# EAGLE board Sparkfun_LilyPad-Switched-Battery-Panel_v13b (EAGLE 9.6.2)
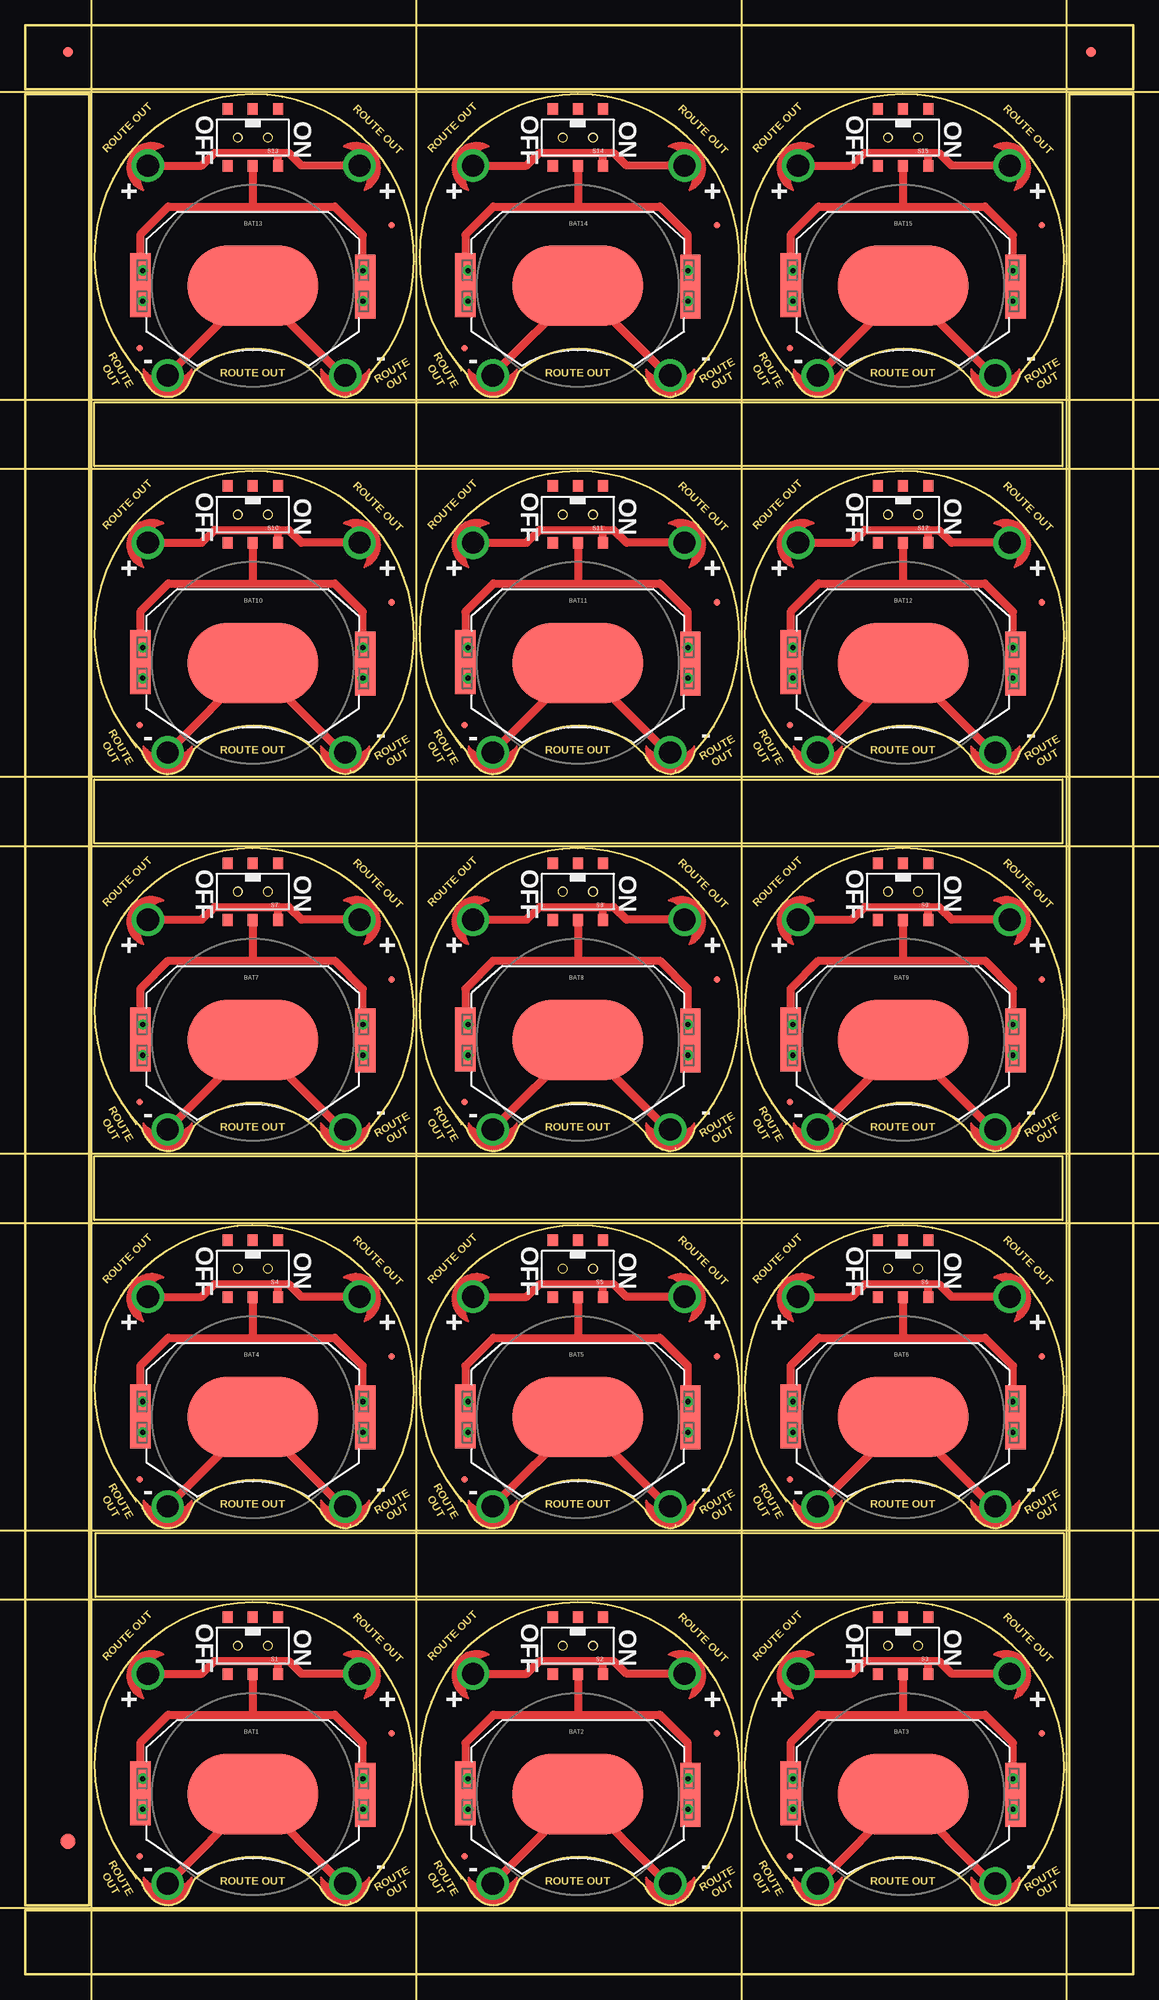
[diagram p0: board, top side]
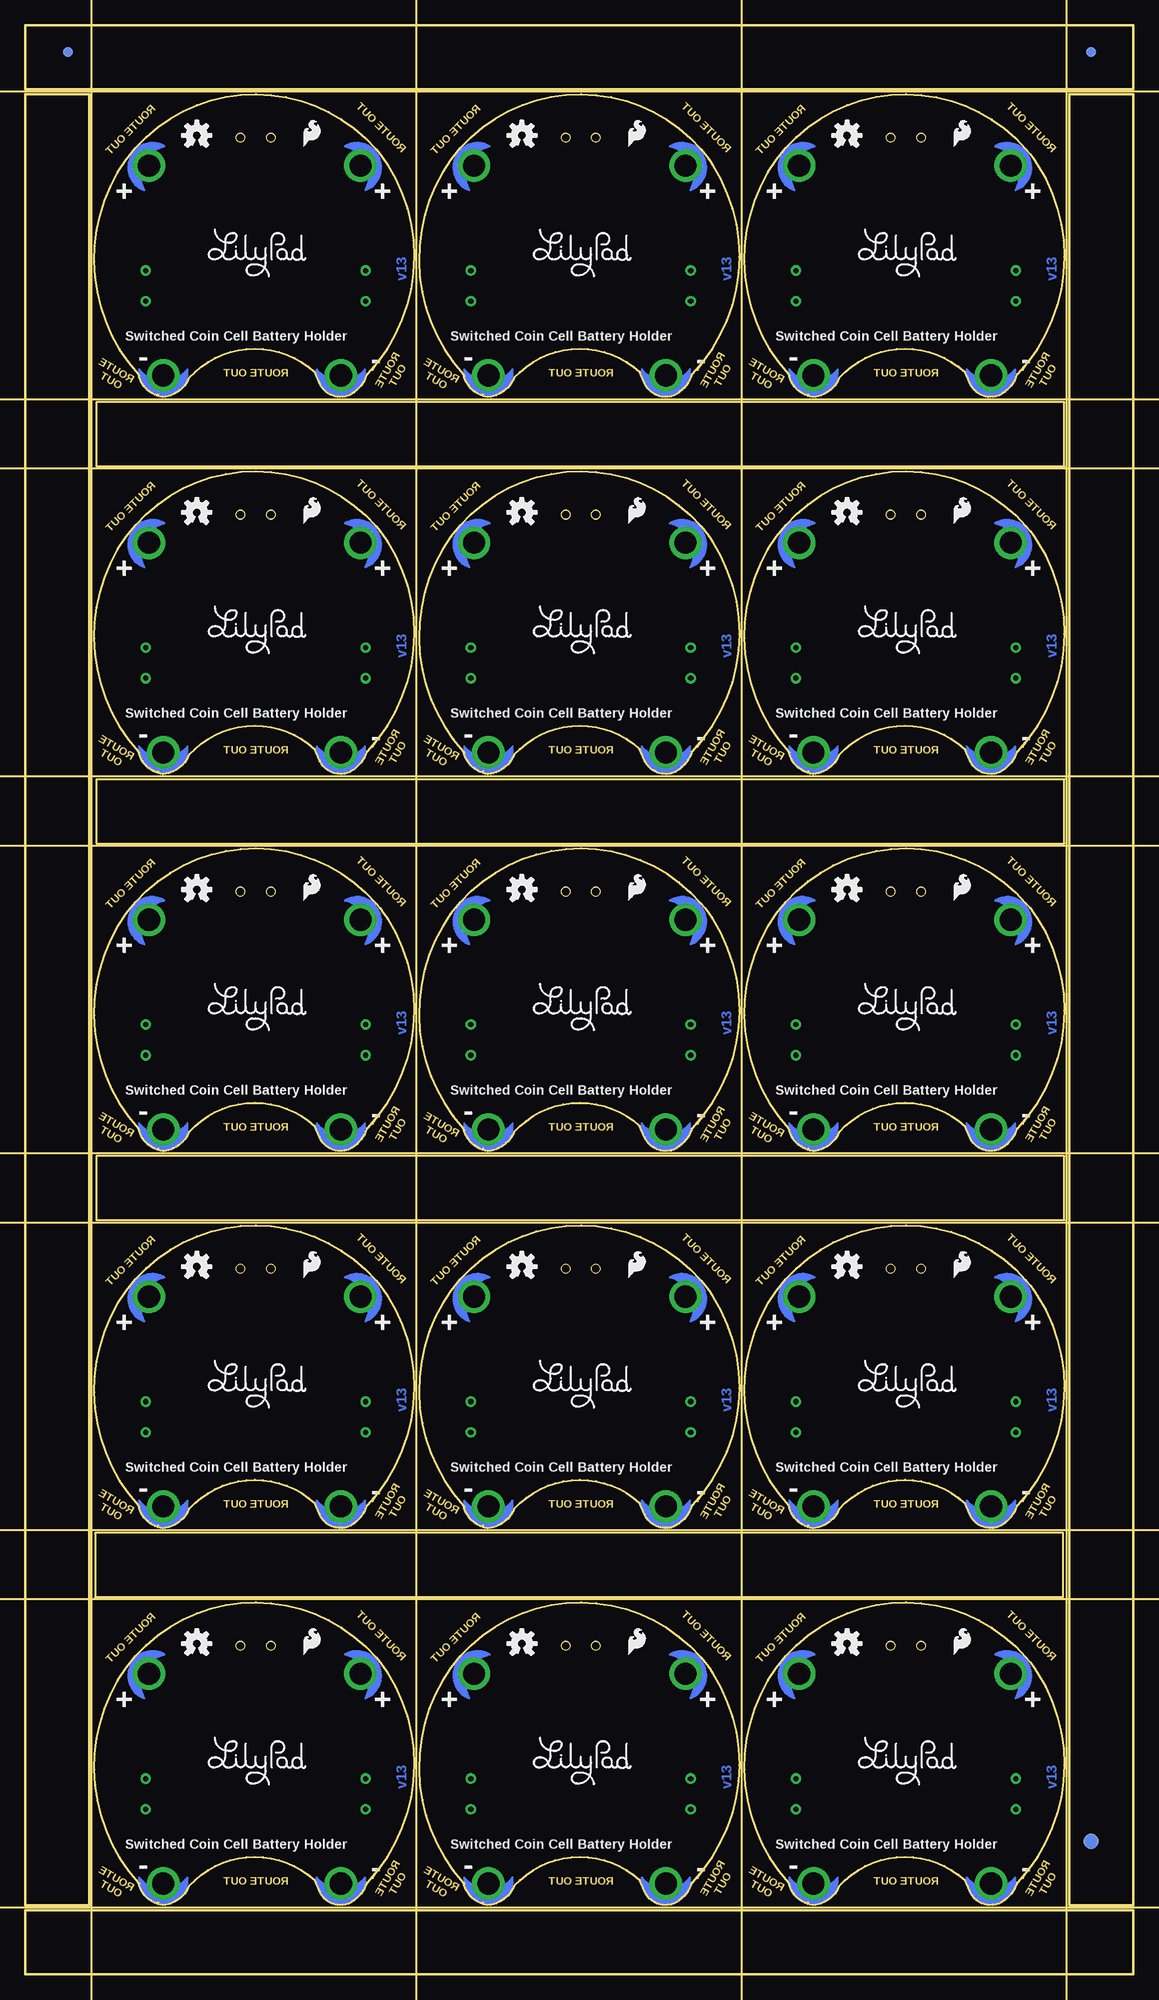
[diagram p1: board, bottom side, seen from below]

Size 110.06 x 193.52 mm. Coordinates in mm from the lower left corner, seen from the top.
Outline: 902 segments
Outline: circle at 21.11,32.61 radius 0.42
Outline: circle at 24.11,32.61 radius 0.42
Outline: circle at 21.11,32.61 radius 0.42
Outline: circle at 24.11,32.61 radius 0.42
Outline: circle at 53.39,32.61 radius 0.42
Outline: circle at 56.39,32.61 radius 0.42
Outline: circle at 53.39,32.61 radius 0.42
Outline: circle at 56.39,32.61 radius 0.42
Outline: circle at 85.67,32.61 radius 0.42
Outline: circle at 88.67,32.61 radius 0.42
Outline: circle at 85.67,32.61 radius 0.42
Outline: circle at 88.67,32.61 radius 0.42
Outline: circle at 21.11,70.04 radius 0.42
Outline: circle at 24.11,70.04 radius 0.42
Outline: circle at 21.11,70.04 radius 0.42
Outline: circle at 24.11,70.04 radius 0.42
Outline: circle at 53.39,70.04 radius 0.42
Outline: circle at 56.39,70.04 radius 0.42
Outline: circle at 53.39,70.04 radius 0.42
Outline: circle at 56.39,70.04 radius 0.42
Copper layers (1*16): Top 0.035mm / dielectric 1.5mm / Bottom 0.035mm
Design rules "Sparkfun_LilyPad-Switched-Battery": minimum track width 10mil, minimum drill 20mil, track to track 10mil, track to pad 8mil, pad to pad 8mil, via to via 10mil, smd to smd 8mil, copper to edge 8mil, drill to drill 8mil, minimum pad ring 10mil, minimum via ring 10mil, stop-mask expansion 4mil, vias tented up to drill 25mil, thermal gap 10mil
Milling: 14 lines

## Footprints (pad centres in the part's own frame; a part is rotated, then mirrored left to right if it is on the bottom)
BATTCON_20MM_4LEGS = smd 13 x 8: NEGATIVE 0,0 | smd 2.032 x 3.175: POSITIVE@1 -11.176,1.651; POSITIVE@2 -11.176,-1.524; POSITIVE@3 11.176,1.524; POSITIVE@4 11.176,-1.651
PETAL-SMALL-2SIDE = drill 2.2: 1 0,0
FIDUCIAL-1X2 = smd 1 x 1: 1 0,0
FIDUCIAL-1.5X3 = smd 1.5 x 1.5: 1 0,0
MICRO-FIDUCIAL = smd 0.635 x 0.635: 1 0,0
AYZ0202 = smd 1 x 1.15: 1 -2.5,2.825; 2 0,2.825; 3 2.5,2.825; 4 -2.5,-2.825; 5 0,-2.825; 6 2.5,-2.825 | hole 0.85: 1.5,0; -1.5,0

## Placement (x,y rotation side)
BAT1  20mm coincell  [BATTCON_20MM_4LEGS]  22.61,17.9 0 top
BAT2  20mm coincell  [BATTCON_20MM_4LEGS]  54.89,17.9 0 top
BAT3  20mm coincell  [BATTCON_20MM_4LEGS]  87.17,17.9 0 top
BAT4  20mm coincell  [BATTCON_20MM_4LEGS]  22.61,55.34 0 top
BAT5  20mm coincell  [BATTCON_20MM_4LEGS]  54.89,55.34 0 top
BAT6  20mm coincell  [BATTCON_20MM_4LEGS]  87.17,55.34 0 top
BAT7  20mm coincell  [BATTCON_20MM_4LEGS]  22.61,92.77 0 top
BAT8  20mm coincell  [BATTCON_20MM_4LEGS]  54.89,92.77 0 top
BAT9  20mm coincell  [BATTCON_20MM_4LEGS]  87.17,92.77 0 top
BAT10  20mm coincell  [BATTCON_20MM_4LEGS]  22.61,130.21 0 top
BAT11  20mm coincell  [BATTCON_20MM_4LEGS]  54.89,130.21 0 top
BAT12  20mm coincell  [BATTCON_20MM_4LEGS]  87.17,130.21 0 top
BAT13  20mm coincell  [BATTCON_20MM_4LEGS]  22.61,167.64 0 top
BAT14  20mm coincell  [BATTCON_20MM_4LEGS]  54.89,167.64 0 top
BAT15  20mm coincell  [BATTCON_20MM_4LEGS]  87.17,167.64 0 top
BATB-  SEWTAP6  [PETAL-SMALL-2SIDE]  14.15,9.01 0 top
BATB-1  SEWTAP6  [PETAL-SMALL-2SIDE]  46.43,9.01 0 top
BATB-2  SEWTAP6  [PETAL-SMALL-2SIDE]  31.78,9.01 0 top
BATB-3  SEWTAP6  [PETAL-SMALL-2SIDE]  64.06,9.01 0 top
BATB-4  SEWTAP6  [PETAL-SMALL-2SIDE]  78.71,9.01 0 top
BATB-5  SEWTAP6  [PETAL-SMALL-2SIDE]  96.34,9.01 0 top
BATB-6  SEWTAP6  [PETAL-SMALL-2SIDE]  14.15,46.45 0 top
BATB-7  SEWTAP6  [PETAL-SMALL-2SIDE]  31.78,46.45 0 top
BATB-8  SEWTAP6  [PETAL-SMALL-2SIDE]  46.43,46.45 0 top
BATB-9  SEWTAP6  [PETAL-SMALL-2SIDE]  64.06,46.45 0 top
BATB-10  SEWTAP6  [PETAL-SMALL-2SIDE]  78.71,46.45 0 top
BATB-11  SEWTAP6  [PETAL-SMALL-2SIDE]  96.34,46.45 0 top
BATB-12  SEWTAP6  [PETAL-SMALL-2SIDE]  14.15,83.88 0 top
BATB-13  SEWTAP6  [PETAL-SMALL-2SIDE]  31.78,83.88 0 top
BATB-14  SEWTAP6  [PETAL-SMALL-2SIDE]  46.43,83.88 0 top
BATB-15  SEWTAP6  [PETAL-SMALL-2SIDE]  64.06,83.88 0 top
BATB-16  SEWTAP6  [PETAL-SMALL-2SIDE]  78.71,83.88 0 top
BATB-17  SEWTAP6  [PETAL-SMALL-2SIDE]  96.34,83.88 0 top
BATB-18  SEWTAP6  [PETAL-SMALL-2SIDE]  14.15,121.32 0 top
BATB-19  SEWTAP6  [PETAL-SMALL-2SIDE]  31.78,121.32 0 top
BATB-20  SEWTAP6  [PETAL-SMALL-2SIDE]  46.43,121.32 0 top
BATB-21  SEWTAP6  [PETAL-SMALL-2SIDE]  64.06,121.32 0 top
BATB-22  SEWTAP6  [PETAL-SMALL-2SIDE]  78.71,121.32 0 top
BATB-23  SEWTAP6  [PETAL-SMALL-2SIDE]  96.34,121.32 0 top
BATB-24  SEWTAP6  [PETAL-SMALL-2SIDE]  14.15,158.75 0 top
BATB-25  SEWTAP6  [PETAL-SMALL-2SIDE]  31.78,158.75 0 top
BATB-26  SEWTAP6  [PETAL-SMALL-2SIDE]  46.43,158.75 0 top
BATB-27  SEWTAP6  [PETAL-SMALL-2SIDE]  64.06,158.75 0 top
BATB-28  SEWTAP6  [PETAL-SMALL-2SIDE]  78.71,158.75 0 top
BATB-29  SEWTAP6  [PETAL-SMALL-2SIDE]  96.34,158.75 0 top
BATT+  SEWTAP6  [PETAL-SMALL-2SIDE]  12.19,29.84 245 top
BATT+1  SEWTAP6  [PETAL-SMALL-2SIDE]  44.48,29.84 245 top
BATT+2  SEWTAP6  [PETAL-SMALL-2SIDE]  33.2,29.84 115 top
BATT+3  SEWTAP6  [PETAL-SMALL-2SIDE]  65.48,29.84 115 top
BATT+4  SEWTAP6  [PETAL-SMALL-2SIDE]  76.76,29.84 245 top
BATT+5  SEWTAP6  [PETAL-SMALL-2SIDE]  97.76,29.84 115 top
BATT+6  SEWTAP6  [PETAL-SMALL-2SIDE]  12.19,67.27 245 top
BATT+7  SEWTAP6  [PETAL-SMALL-2SIDE]  33.2,67.27 115 top
BATT+8  SEWTAP6  [PETAL-SMALL-2SIDE]  44.48,67.27 245 top
BATT+9  SEWTAP6  [PETAL-SMALL-2SIDE]  65.48,67.27 115 top
BATT+10  SEWTAP6  [PETAL-SMALL-2SIDE]  76.76,67.27 245 top
BATT+11  SEWTAP6  [PETAL-SMALL-2SIDE]  97.76,67.27 115 top
BATT+12  SEWTAP6  [PETAL-SMALL-2SIDE]  12.19,104.71 245 top
BATT+13  SEWTAP6  [PETAL-SMALL-2SIDE]  33.2,104.71 115 top
BATT+14  SEWTAP6  [PETAL-SMALL-2SIDE]  44.48,104.71 245 top
BATT+15  SEWTAP6  [PETAL-SMALL-2SIDE]  65.48,104.71 115 top
BATT+16  SEWTAP6  [PETAL-SMALL-2SIDE]  76.76,104.71 245 top
BATT+17  SEWTAP6  [PETAL-SMALL-2SIDE]  97.76,104.71 115 top
BATT+18  SEWTAP6  [PETAL-SMALL-2SIDE]  12.19,142.14 245 top
BATT+19  SEWTAP6  [PETAL-SMALL-2SIDE]  33.2,142.14 115 top
BATT+20  SEWTAP6  [PETAL-SMALL-2SIDE]  44.48,142.14 245 top
BATT+21  SEWTAP6  [PETAL-SMALL-2SIDE]  65.48,142.14 115 top
BATT+22  SEWTAP6  [PETAL-SMALL-2SIDE]  76.76,142.14 245 top
BATT+23  SEWTAP6  [PETAL-SMALL-2SIDE]  97.76,142.14 115 top
BATT+24  SEWTAP6  [PETAL-SMALL-2SIDE]  12.19,179.58 245 top
BATT+25  SEWTAP6  [PETAL-SMALL-2SIDE]  33.2,179.58 115 top
BATT+26  SEWTAP6  [PETAL-SMALL-2SIDE]  44.48,179.58 245 top
BATT+27  SEWTAP6  [PETAL-SMALL-2SIDE]  65.48,179.58 115 top
BATT+28  SEWTAP6  [PETAL-SMALL-2SIDE]  76.76,179.58 245 top
BATT+29  SEWTAP6  [PETAL-SMALL-2SIDE]  97.76,179.58 115 top
E$1  [FIDUCIAL-1X2]  4.23,190.86 0 top
E$2  [FIDUCIAL-1X2]  4.23,190.86 0 bottom
E$3  [FIDUCIAL-1X2]  105.82,190.86 0 top
E$4  [FIDUCIAL-1X2]  105.82,190.86 0 bottom
E$5  [FIDUCIAL-1.5X3]  4.23,13.21 0 top
E$6  [FIDUCIAL-1.5X3]  4.23,13.21 0 bottom
FD1  FIDUCIALUFIDUCIAL  [MICRO-FIDUCIAL]  36.39,23.91 0 top
FD2  FIDUCIALUFIDUCIAL  [MICRO-FIDUCIAL]  11.36,11.72 0 top
FD3  FIDUCIALUFIDUCIAL  [MICRO-FIDUCIAL]  68.67,23.91 0 top
FD4  FIDUCIALUFIDUCIAL  [MICRO-FIDUCIAL]  43.64,11.72 0 top
FD5  FIDUCIALUFIDUCIAL  [MICRO-FIDUCIAL]  100.95,23.91 0 top
FD6  FIDUCIALUFIDUCIAL  [MICRO-FIDUCIAL]  75.92,11.72 0 top
FD7  FIDUCIALUFIDUCIAL  [MICRO-FIDUCIAL]  36.39,61.35 0 top
FD8  FIDUCIALUFIDUCIAL  [MICRO-FIDUCIAL]  11.36,49.16 0 top
FD9  FIDUCIALUFIDUCIAL  [MICRO-FIDUCIAL]  68.67,61.35 0 top
FD10  FIDUCIALUFIDUCIAL  [MICRO-FIDUCIAL]  43.64,49.16 0 top
FD11  FIDUCIALUFIDUCIAL  [MICRO-FIDUCIAL]  100.95,61.35 0 top
FD12  FIDUCIALUFIDUCIAL  [MICRO-FIDUCIAL]  75.92,49.16 0 top
FD13  FIDUCIALUFIDUCIAL  [MICRO-FIDUCIAL]  36.39,98.78 0 top
FD14  FIDUCIALUFIDUCIAL  [MICRO-FIDUCIAL]  11.36,86.59 0 top
FD15  FIDUCIALUFIDUCIAL  [MICRO-FIDUCIAL]  68.67,98.78 0 top
FD16  FIDUCIALUFIDUCIAL  [MICRO-FIDUCIAL]  43.64,86.59 0 top
FD17  FIDUCIALUFIDUCIAL  [MICRO-FIDUCIAL]  100.95,98.78 0 top
FD18  FIDUCIALUFIDUCIAL  [MICRO-FIDUCIAL]  75.92,86.59 0 top
FD19  FIDUCIALUFIDUCIAL  [MICRO-FIDUCIAL]  36.39,136.22 0 top
FD20  FIDUCIALUFIDUCIAL  [MICRO-FIDUCIAL]  11.36,124.03 0 top
FD21  FIDUCIALUFIDUCIAL  [MICRO-FIDUCIAL]  68.67,136.22 0 top
FD22  FIDUCIALUFIDUCIAL  [MICRO-FIDUCIAL]  43.64,124.03 0 top
FD23  FIDUCIALUFIDUCIAL  [MICRO-FIDUCIAL]  100.95,136.22 0 top
FD24  FIDUCIALUFIDUCIAL  [MICRO-FIDUCIAL]  75.92,124.03 0 top
FD25  FIDUCIALUFIDUCIAL  [MICRO-FIDUCIAL]  36.39,173.65 0 top
FD26  FIDUCIALUFIDUCIAL  [MICRO-FIDUCIAL]  11.36,161.46 0 top
FD27  FIDUCIALUFIDUCIAL  [MICRO-FIDUCIAL]  68.67,173.65 0 top
FD28  FIDUCIALUFIDUCIAL  [MICRO-FIDUCIAL]  43.64,161.46 0 top
FD29  FIDUCIALUFIDUCIAL  [MICRO-FIDUCIAL]  100.95,173.65 0 top
FD30  FIDUCIALUFIDUCIAL  [MICRO-FIDUCIAL]  75.92,161.46 0 top
LOGO1  SFE_LOGO_FLAME.1_INCH  [SFE_LOGO_FLAME_.1]  18.16,31.41 0 bottom
LOGO2  OSHW-LOGOS  [OSHW-LOGO-S]  28.45,32.84 0 bottom
LOGO3  SFE_LOGO_FLAME.1_INCH  [SFE_LOGO_FLAME_.1]  50.44,31.41 0 bottom
LOGO4  OSHW-LOGOS  [OSHW-LOGO-S]  60.73,32.84 0 bottom
LOGO5  SFE_LOGO_FLAME.1_INCH  [SFE_LOGO_FLAME_.1]  82.73,31.41 0 bottom
LOGO6  OSHW-LOGOS  [OSHW-LOGO-S]  93.01,32.84 0 bottom
LOGO7  SFE_LOGO_FLAME.1_INCH  [SFE_LOGO_FLAME_.1]  18.16,68.85 0 bottom
LOGO8  OSHW-LOGOS  [OSHW-LOGO-S]  28.45,70.27 0 bottom
LOGO9  SFE_LOGO_FLAME.1_INCH  [SFE_LOGO_FLAME_.1]  50.44,68.85 0 bottom
LOGO10  OSHW-LOGOS  [OSHW-LOGO-S]  60.73,70.27 0 bottom
LOGO11  SFE_LOGO_FLAME.1_INCH  [SFE_LOGO_FLAME_.1]  82.73,68.85 0 bottom
LOGO12  OSHW-LOGOS  [OSHW-LOGO-S]  93.01,70.27 0 bottom
LOGO13  SFE_LOGO_FLAME.1_INCH  [SFE_LOGO_FLAME_.1]  18.16,106.28 0 bottom
LOGO14  OSHW-LOGOS  [OSHW-LOGO-S]  28.45,107.71 0 bottom
LOGO15  SFE_LOGO_FLAME.1_INCH  [SFE_LOGO_FLAME_.1]  50.44,106.28 0 bottom
LOGO16  OSHW-LOGOS  [OSHW-LOGO-S]  60.73,107.71 0 bottom
LOGO17  SFE_LOGO_FLAME.1_INCH  [SFE_LOGO_FLAME_.1]  82.73,106.28 0 bottom
LOGO18  OSHW-LOGOS  [OSHW-LOGO-S]  93.01,107.71 0 bottom
LOGO19  SFE_LOGO_FLAME.1_INCH  [SFE_LOGO_FLAME_.1]  18.16,143.72 0 bottom
LOGO20  OSHW-LOGOS  [OSHW-LOGO-S]  28.45,145.14 0 bottom
LOGO21  SFE_LOGO_FLAME.1_INCH  [SFE_LOGO_FLAME_.1]  50.44,143.72 0 bottom
LOGO22  OSHW-LOGOS  [OSHW-LOGO-S]  60.73,145.14 0 bottom
LOGO23  SFE_LOGO_FLAME.1_INCH  [SFE_LOGO_FLAME_.1]  82.73,143.72 0 bottom
LOGO24  OSHW-LOGOS  [OSHW-LOGO-S]  93.01,145.14 0 bottom
LOGO25  SFE_LOGO_FLAME.1_INCH  [SFE_LOGO_FLAME_.1]  18.16,181.15 0 bottom
LOGO26  OSHW-LOGOS  [OSHW-LOGO-S]  28.45,182.58 0 bottom
LOGO27  SFE_LOGO_FLAME.1_INCH  [SFE_LOGO_FLAME_.1]  50.44,181.15 0 bottom
LOGO28  OSHW-LOGOS  [OSHW-LOGO-S]  60.73,182.58 0 bottom
LOGO29  SFE_LOGO_FLAME.1_INCH  [SFE_LOGO_FLAME_.1]  82.73,181.15 0 bottom
LOGO30  OSHW-LOGOS  [OSHW-LOGO-S]  93.01,182.58 0 bottom
S1  [AYZ0202]  22.61,32.63 180 top
S2  [AYZ0202]  54.89,32.63 180 top
S3  [AYZ0202]  87.17,32.63 180 top
S4  [AYZ0202]  22.61,70.07 180 top
S5  [AYZ0202]  54.89,70.07 180 top
S6  [AYZ0202]  87.17,70.07 180 top
S7  [AYZ0202]  22.61,107.5 180 top
S8  [AYZ0202]  54.89,107.5 180 top
S9  [AYZ0202]  87.17,107.5 180 top
S10  [AYZ0202]  22.61,144.94 180 top
S11  [AYZ0202]  54.89,144.94 180 top
S12  [AYZ0202]  87.17,144.94 180 top
S13  [AYZ0202]  22.61,182.37 180 top
S14  [AYZ0202]  54.89,182.37 180 top
S15  [AYZ0202]  87.17,182.37 180 top
U$3  [LOGO-LILYPAD]  22.4,21.51 0 bottom
U$4  [LOGO-LILYPAD]  54.69,21.51 0 bottom
U$6  [LOGO-LILYPAD]  86.97,21.51 0 bottom
U$7  REVISION  [REVISION]  9.03,32.04 0 top
U$8  [LOGO-LILYPAD]  22.4,58.94 0 bottom
U$9  REVISION  [REVISION]  41.31,32.04 0 top
U$10  [LOGO-LILYPAD]  54.69,58.94 0 bottom
U$11  REVISION  [REVISION]  73.59,32.04 0 top
U$12  [LOGO-LILYPAD]  86.97,58.94 0 bottom
U$13  REVISION  [REVISION]  9.03,69.47 0 top
U$14  [LOGO-LILYPAD]  22.4,96.38 0 bottom
U$15  REVISION  [REVISION]  41.31,69.47 0 top
U$16  [LOGO-LILYPAD]  54.69,96.38 0 bottom
U$17  REVISION  [REVISION]  73.59,69.47 0 top
U$18  [LOGO-LILYPAD]  86.97,96.38 0 bottom
U$19  REVISION  [REVISION]  9.03,106.91 0 top
U$20  [LOGO-LILYPAD]  22.4,133.81 0 bottom
U$21  REVISION  [REVISION]  41.31,106.91 0 top
U$22  [LOGO-LILYPAD]  54.69,133.81 0 bottom
U$23  REVISION  [REVISION]  73.59,106.91 0 top
U$24  [LOGO-LILYPAD]  86.97,133.81 0 bottom
U$25  REVISION  [REVISION]  9.03,144.34 0 top
U$26  [LOGO-LILYPAD]  22.4,171.25 0 bottom
U$27  REVISION  [REVISION]  41.31,144.34 0 top
U$28  [LOGO-LILYPAD]  54.69,171.25 0 bottom
U$29  REVISION  [REVISION]  73.59,144.34 0 top
U$30  [LOGO-LILYPAD]  86.97,171.25 0 bottom

## Library data of the parts
BAT1-BAT15 = SparkFun-Electromechanical; PROD_ID: BATT-10373
BATB- BATB-1-BATB-29 BATT+ BATT+1-BATT+29 U$3 U$4 U$6 U$8 U$10 U$12 U$14 U$16 U$18 U$20 U$22 U$24 U$26 U$28 U$30 = LilyPad-Wearables
E$1-E$4 FD1-FD30 LOGO1-LOGO30 U$7 U$9 U$11 U$13 U$15 U$17 U$19 U$21 U$23 U$25 U$27 U$29 = SparkFun-Aesthetics
E$5 E$6 = SparkFun-Retired
S1-S15 = SparkFun-Electromechanical; PROD_ID: SWCH-08179; SF_ID: COM-00597

## Nets
GND: BAT1.NEGATIVE BATB-2.1 BATB-.1
GND1: BAT2.NEGATIVE BATB-1.1 BATB-3.1
GND2: BAT3.NEGATIVE BATB-4.1 BATB-5.1
GND3: BAT4.NEGATIVE BATB-6.1 BATB-7.1
GND4: BAT5.NEGATIVE BATB-8.1 BATB-9.1
GND5: BAT6.NEGATIVE BATB-10.1 BATB-11.1
GND6: BAT7.NEGATIVE BATB-12.1 BATB-13.1
GND7: BAT8.NEGATIVE BATB-14.1 BATB-15.1
GND8: BAT9.NEGATIVE BATB-16.1 BATB-17.1
GND9: BAT10.NEGATIVE BATB-18.1 BATB-19.1
GND10: BAT11.NEGATIVE BATB-20.1 BATB-21.1
GND11: BAT12.NEGATIVE BATB-22.1 BATB-23.1
GND12: BAT13.NEGATIVE BATB-24.1 BATB-25.1
GND13: BAT14.NEGATIVE BATB-26.1 BATB-27.1
GND14: BAT15.NEGATIVE BATB-28.1 BATB-29.1
N$1: BAT1.POSITIVE@1 BAT1.POSITIVE@2 BAT1.POSITIVE@3 BAT1.POSITIVE@4 S1.2
N$2: BATT+2.1 BATT+.1 S1.1
N$3: BAT2.POSITIVE@1 BAT2.POSITIVE@2 BAT2.POSITIVE@3 BAT2.POSITIVE@4 S2.2
N$4: BATT+1.1 BATT+3.1 S2.1
N$5: BAT3.POSITIVE@1 BAT3.POSITIVE@2 BAT3.POSITIVE@3 BAT3.POSITIVE@4 S3.2
N$6: BATT+4.1 BATT+5.1 S3.1
N$7: BAT4.POSITIVE@1 BAT4.POSITIVE@2 BAT4.POSITIVE@3 BAT4.POSITIVE@4 S4.2
N$8: BATT+6.1 BATT+7.1 S4.1
N$9: BAT5.POSITIVE@1 BAT5.POSITIVE@2 BAT5.POSITIVE@3 BAT5.POSITIVE@4 S5.2
N$10: BATT+8.1 BATT+9.1 S5.1
N$11: BAT6.POSITIVE@1 BAT6.POSITIVE@2 BAT6.POSITIVE@3 BAT6.POSITIVE@4 S6.2
N$12: BATT+10.1 BATT+11.1 S6.1
N$13: BAT7.POSITIVE@1 BAT7.POSITIVE@2 BAT7.POSITIVE@3 BAT7.POSITIVE@4 S7.2
N$14: BATT+12.1 BATT+13.1 S7.1
N$15: BAT8.POSITIVE@1 BAT8.POSITIVE@2 BAT8.POSITIVE@3 BAT8.POSITIVE@4 S8.2
N$16: BATT+14.1 BATT+15.1 S8.1
N$17: BAT9.POSITIVE@1 BAT9.POSITIVE@2 BAT9.POSITIVE@3 BAT9.POSITIVE@4 S9.2
N$18: BATT+16.1 BATT+17.1 S9.1
N$19: BAT10.POSITIVE@1 BAT10.POSITIVE@2 BAT10.POSITIVE@3 BAT10.POSITIVE@4 S10.2
N$20: BATT+18.1 BATT+19.1 S10.1
N$21: BAT11.POSITIVE@1 BAT11.POSITIVE@2 BAT11.POSITIVE@3 BAT11.POSITIVE@4 S11.2
N$22: BATT+20.1 BATT+21.1 S11.1
N$23: BAT12.POSITIVE@1 BAT12.POSITIVE@2 BAT12.POSITIVE@3 BAT12.POSITIVE@4 S12.2
N$24: BATT+22.1 BATT+23.1 S12.1
N$25: BAT13.POSITIVE@1 BAT13.POSITIVE@2 BAT13.POSITIVE@3 BAT13.POSITIVE@4 S13.2
N$26: BATT+24.1 BATT+25.1 S13.1
N$27: BAT14.POSITIVE@1 BAT14.POSITIVE@2 BAT14.POSITIVE@3 BAT14.POSITIVE@4 S14.2
N$28: BATT+26.1 BATT+27.1 S14.1
N$29: BAT15.POSITIVE@1 BAT15.POSITIVE@2 BAT15.POSITIVE@3 BAT15.POSITIVE@4 S15.2
N$30: BATT+28.1 BATT+29.1 S15.1

## Tracks (layer width: path | path; a pad name or v marks a point on that pad's centre or on a via)
GND
  Top 0.813: BATB-.1 22.61,17.47 BAT1.NEGATIVE 31.5,9.01 BATB-2.1
GND1
  Top 0.813: BATB-1.1 54.89,17.47 BAT2.NEGATIVE 63.78,9.01 BATB-3.1
GND2
  Top 0.813: BATB-4.1 87.17,17.47 BAT3.NEGATIVE 96.06,9.01 BATB-5.1
GND3
  Top 0.813: BATB-6.1 22.61,54.9 BAT4.NEGATIVE 31.5,46.45 BATB-7.1
GND4
  Top 0.813: BATB-8.1 54.89,54.9 BAT5.NEGATIVE 63.78,46.45 BATB-9.1
GND5
  Top 0.813: BATB-10.1 87.17,54.9 BAT6.NEGATIVE 96.06,46.45 BATB-11.1
GND6
  Top 0.813: BATB-12.1 22.61,92.34 BAT7.NEGATIVE 31.5,83.88 BATB-13.1
GND7
  Top 0.813: BATB-14.1 54.89,92.34 BAT8.NEGATIVE 63.78,83.88 BATB-15.1
GND8
  Top 0.813: BATB-16.1 87.17,92.34 BAT9.NEGATIVE 96.06,83.88 BATB-17.1
GND9
  Top 0.813: BATB-18.1 22.61,129.77 BAT10.NEGATIVE 31.5,121.31 BATB-19.1
GND10
  Top 0.813: BATB-20.1 54.89,129.77 BAT11.NEGATIVE 63.78,121.31 BATB-21.1
GND11
  Top 0.813: BATB-22.1 87.17,129.77 BAT12.NEGATIVE 96.06,121.31 BATB-23.1
GND12
  Top 0.813: BATB-24.1 22.61,167.21 BAT13.NEGATIVE 31.5,158.75 BATB-25.1
GND13
  Top 0.813: BATB-26.1 54.89,167.21 BAT14.NEGATIVE 63.78,158.75 BATB-27.1
GND14
  Top 0.813: BATB-28.1 87.17,167.21 BAT15.NEGATIVE 96.06,158.75 BATB-29.1
N$1  (via drill 0.51)
  Top 0.254: BAT1.POSITIVE@3 v33.53,19.43
  Top 0.813: 22.61,25.78 14.22,25.78 11.43,22.98 BAT1.POSITIVE@1 | 22.61,25.78 30.73,25.78 33.53,22.98 v33.53,19.43 v33.53,16.38 33.78,16.38 34.29,15.87 34.29,16.76 | BAT1.POSITIVE@2 v11.68,16.38 11.68,19.3 | S1.2 22.61,25.78 | BAT1.POSITIVE@1 11.43,19.17 11.18,18.92 11.18,19.3 | 11.68,19.3 BAT1.POSITIVE@1 | 11.68,19.3 v11.68,19.43 | 34.29,17.14 34.29,16.76 | 34.29,16.76 BAT1.POSITIVE@4
N$2
  Top 0.813: BATT+.1 17.53,29.84 18.8,31.11 25.15,31.11 | 25.15,31.11 26.16,31.11 27.43,29.84 BATT+2.1 | S1.1 25.11,31.07 25.15,31.11
N$3  (via drill 0.51)
  Top 0.254: BAT2.POSITIVE@3 v65.81,19.43
  Top 0.813: 54.89,25.78 46.51,25.78 43.71,22.98 BAT2.POSITIVE@1 | 54.89,25.78 63.02,25.78 65.81,22.98 v65.81,19.43 v65.81,16.38 66.06,16.38 66.57,15.87 66.57,16.76 | BAT2.POSITIVE@2 v43.97,16.38 43.97,19.3 | S2.2 54.89,25.78 | BAT2.POSITIVE@1 43.71,19.17 43.46,18.92 43.46,19.3 | 43.97,19.3 BAT2.POSITIVE@1 | 43.97,19.3 v43.97,19.43 | 66.57,17.14 66.57,16.76 | 66.57,16.76 BAT2.POSITIVE@4
N$4
  Top 0.813: BATT+1.1 49.81,29.84 51.08,31.11 57.43,31.11 | 57.43,31.11 58.45,31.11 59.71,29.84 BATT+3.1 | S2.1 57.39,31.07 57.43,31.11
N$5  (via drill 0.51)
  Top 0.254: BAT3.POSITIVE@3 v98.09,19.43
  Top 0.813: 87.17,25.78 78.79,25.78 76,22.98 BAT3.POSITIVE@1 | 87.17,25.78 95.3,25.78 98.09,22.98 v98.09,19.43 v98.09,16.38 98.35,16.38 98.86,15.87 98.86,16.76 | BAT3.POSITIVE@2 v76.25,16.38 76.25,19.3 | S3.2 87.17,25.78 | BAT3.POSITIVE@1 76,19.17 75.74,18.92 75.74,19.3 | 76.25,19.3 BAT3.POSITIVE@1 | 76.25,19.3 v76.25,19.43 | 98.86,17.14 98.86,16.76 | 98.86,16.76 BAT3.POSITIVE@4
N$6
  Top 0.813: BATT+4.1 82.09,29.84 83.36,31.11 89.71,31.11 | 89.71,31.11 90.73,31.11 92,29.84 BATT+5.1 | S3.1 89.67,31.07 89.71,31.11
N$7  (via drill 0.51)
  Top 0.254: BAT4.POSITIVE@3 v33.53,56.86
  Top 0.813: 22.61,63.21 14.22,63.21 11.43,60.42 BAT4.POSITIVE@1 | 22.61,63.21 30.73,63.21 33.53,60.42 v33.53,56.86 v33.53,53.81 33.78,53.81 34.29,53.3 34.29,54.19 | BAT4.POSITIVE@2 v11.68,53.81 11.68,56.73 | S4.2 22.61,63.21 | BAT4.POSITIVE@1 11.43,56.61 11.18,56.35 11.18,56.73 | 11.68,56.73 BAT4.POSITIVE@1 | 11.68,56.73 v11.68,56.86 | 34.29,54.57 34.29,54.19 | 34.29,54.19 BAT4.POSITIVE@4
N$8
  Top 0.813: BATT+6.1 17.53,67.27 18.8,68.54 25.15,68.54 | 25.15,68.54 26.16,68.54 27.43,67.27 BATT+7.1 | S4.1 25.11,68.5 25.15,68.54
N$9  (via drill 0.51)
  Top 0.254: BAT5.POSITIVE@3 v65.81,56.86
  Top 0.813: 54.89,63.21 46.51,63.21 43.71,60.42 BAT5.POSITIVE@1 | 54.89,63.21 63.02,63.21 65.81,60.42 v65.81,56.86 v65.81,53.81 66.06,53.81 66.57,53.3 66.57,54.19 | BAT5.POSITIVE@2 v43.97,53.81 43.97,56.73 | S5.2 54.89,63.21 | BAT5.POSITIVE@1 43.71,56.61 43.46,56.35 43.46,56.73 | 43.97,56.73 BAT5.POSITIVE@1 | 43.97,56.73 v43.97,56.86 | 66.57,54.57 66.57,54.19 | 66.57,54.19 BAT5.POSITIVE@4
N$10
  Top 0.813: BATT+8.1 49.81,67.27 51.08,68.54 57.43,68.54 | 57.43,68.54 58.45,68.54 59.71,67.27 BATT+9.1 | S5.1 57.39,68.5 57.43,68.54
N$11  (via drill 0.51)
  Top 0.254: BAT6.POSITIVE@3 v98.09,56.86
  Top 0.813: 87.17,63.21 78.79,63.21 76,60.42 BAT6.POSITIVE@1 | 87.17,63.21 95.3,63.21 98.09,60.42 v98.09,56.86 v98.09,53.81 98.35,53.81 98.86,53.3 98.86,54.19 | BAT6.POSITIVE@2 v76.25,53.81 76.25,56.73 | S6.2 87.17,63.21 | BAT6.POSITIVE@1 76,56.61 75.74,56.35 75.74,56.73 | 76.25,56.73 BAT6.POSITIVE@1 | 76.25,56.73 v76.25,56.86 | 98.86,54.57 98.86,54.19 | 98.86,54.19 BAT6.POSITIVE@4
N$12
  Top 0.813: BATT+10.1 82.09,67.27 83.36,68.54 89.71,68.54 | 89.71,68.54 90.73,68.54 92,67.27 BATT+11.1 | S6.1 89.67,68.5 89.71,68.54
N$13  (via drill 0.51)
  Top 0.254: BAT7.POSITIVE@3 v33.53,94.3
  Top 0.813: 22.61,100.65 14.22,100.65 11.43,97.85 BAT7.POSITIVE@1 | 22.61,100.65 30.73,100.65 33.53,97.85 v33.53,94.3 v33.53,91.25 33.78,91.25 34.29,90.74 34.29,91.63 | BAT7.POSITIVE@2 v11.68,91.25 11.68,94.17 | S7.2 22.61,100.65 | BAT7.POSITIVE@1 11.43,94.04 11.18,93.79 11.18,94.17 | 11.68,94.17 BAT7.POSITIVE@1 | 11.68,94.17 v11.68,94.3 | 34.29,92.01 34.29,91.63 | 34.29,91.63 BAT7.POSITIVE@4
N$14
  Top 0.813: BATT+12.1 17.53,104.71 18.8,105.98 25.15,105.98 | 25.15,105.98 26.16,105.98 27.43,104.71 BATT+13.1 | S7.1 25.11,105.94 25.15,105.98
N$15  (via drill 0.51)
  Top 0.254: BAT8.POSITIVE@3 v65.81,94.3
  Top 0.813: 54.89,100.65 46.51,100.65 43.71,97.85 BAT8.POSITIVE@1 | 54.89,100.65 63.02,100.65 65.81,97.85 v65.81,94.3 v65.81,91.25 66.06,91.25 66.57,90.74 66.57,91.63 | BAT8.POSITIVE@2 v43.97,91.25 43.97,94.17 | S8.2 54.89,100.65 | BAT8.POSITIVE@1 43.71,94.04 43.46,93.79 43.46,94.17 | 43.97,94.17 BAT8.POSITIVE@1 | 43.97,94.17 v43.97,94.3 | 66.57,92.01 66.57,91.63 | 66.57,91.63 BAT8.POSITIVE@4
N$16
  Top 0.813: BATT+14.1 49.81,104.71 51.08,105.98 57.43,105.98 | 57.43,105.98 58.45,105.98 59.71,104.71 BATT+15.1 | S8.1 57.39,105.94 57.43,105.98
N$17  (via drill 0.51)
  Top 0.254: BAT9.POSITIVE@3 v98.09,94.3
  Top 0.813: 87.17,100.65 78.79,100.65 76,97.85 BAT9.POSITIVE@1 | 87.17,100.65 95.3,100.65 98.09,97.85 v98.09,94.3 v98.09,91.25 98.35,91.25 98.86,90.74 98.86,91.63 | BAT9.POSITIVE@2 v76.25,91.25 76.25,94.17 | S9.2 87.17,100.65 | BAT9.POSITIVE@1 76,94.04 75.74,93.79 75.74,94.17 | 76.25,94.17 BAT9.POSITIVE@1 | 76.25,94.17 v76.25,94.3 | 98.86,92.01 98.86,91.63 | 98.86,91.63 BAT9.POSITIVE@4
N$18
  Top 0.813: BATT+16.1 82.09,104.71 83.36,105.98 89.71,105.98 | 89.71,105.98 90.73,105.98 92,104.71 BATT+17.1 | S9.1 89.67,105.94 89.71,105.98
N$19  (via drill 0.51)
  Top 0.254: BAT10.POSITIVE@3 v33.53,131.73
  Top 0.813: 22.61,138.08 14.22,138.08 11.43,135.28 BAT10.POSITIVE@1 | 22.61,138.08 30.73,138.08 33.53,135.28 v33.53,131.73 v33.53,128.68 33.78,128.68 34.29,128.17 34.29,129.06 | BAT10.POSITIVE@2 v11.68,128.68 11.68,131.6 | S10.2 22.61,138.08 | BAT10.POSITIVE@1 11.43,131.47 11.18,131.22 11.18,131.6 | 11.68,131.6 BAT10.POSITIVE@1 | 11.68,131.6 v11.68,131.73 | 34.29,129.44 34.29,129.06 | 34.29,129.06 BAT10.POSITIVE@4
N$20
  Top 0.813: BATT+18.1 17.53,142.14 18.8,143.41 25.15,143.41 | 25.15,143.41 26.16,143.41 27.43,142.14 BATT+19.1 | S10.1 25.11,143.37 25.15,143.41
N$21  (via drill 0.51)
  Top 0.254: BAT11.POSITIVE@3 v65.81,131.73
  Top 0.813: 54.89,138.08 46.51,138.08 43.71,135.28 BAT11.POSITIVE@1 | 54.89,138.08 63.02,138.08 65.81,135.28 v65.81,131.73 v65.81,128.68 66.06,128.68 66.57,128.17 66.57,129.06 | BAT11.POSITIVE@2 v43.97,128.68 43.97,131.6 | S11.2 54.89,138.08 | BAT11.POSITIVE@1 43.71,131.47 43.46,131.22 43.46,131.6 | 43.97,131.6 BAT11.POSITIVE@1 | 43.97,131.6 v43.97,131.73 | 66.57,129.44 66.57,129.06 | 66.57,129.06 BAT11.POSITIVE@4
N$22
  Top 0.813: BATT+20.1 49.81,142.14 51.08,143.41 57.43,143.41 | 57.43,143.41 58.45,143.41 59.71,142.14 BATT+21.1 | S11.1 57.39,143.37 57.43,143.41
N$23  (via drill 0.51)
  Top 0.254: BAT12.POSITIVE@3 v98.09,131.73
  Top 0.813: 87.17,138.08 78.79,138.08 76,135.28 BAT12.POSITIVE@1 | 87.17,138.08 95.3,138.08 98.09,135.28 v98.09,131.73 v98.09,128.68 98.35,128.68 98.86,128.17 98.86,129.06 | BAT12.POSITIVE@2 v76.25,128.68 76.25,131.6 | S12.2 87.17,138.08 | BAT12.POSITIVE@1 76,131.47 75.74,131.22 75.74,131.6 | 76.25,131.6 BAT12.POSITIVE@1 | 76.25,131.6 v76.25,131.73 | 98.86,129.44 98.86,129.06 | 98.86,129.06 BAT12.POSITIVE@4
N$24
  Top 0.813: BATT+22.1 82.09,142.14 83.36,143.41 89.71,143.41 | 89.71,143.41 90.73,143.41 92,142.14 BATT+23.1 | S12.1 89.67,143.37 89.71,143.41
N$25  (via drill 0.51)
  Top 0.254: BAT13.POSITIVE@3 v33.53,169.16
  Top 0.813: 22.61,175.51 14.22,175.51 11.43,172.72 BAT13.POSITIVE@1 | 22.61,175.51 30.73,175.51 33.53,172.72 v33.53,169.16 v33.53,166.12 33.78,166.12 34.29,165.61 34.29,166.5 | BAT13.POSITIVE@2 v11.68,166.12 11.68,169.04 | S13.2 22.61,175.51 | BAT13.POSITIVE@1 11.43,168.91 11.18,168.66 11.18,169.04 | 11.68,169.04 BAT13.POSITIVE@1 | 11.68,169.04 v11.68,169.16 | 34.29,166.88 34.29,166.5 | 34.29,166.5 BAT13.POSITIVE@4
N$26
  Top 0.813: BATT+24.1 17.53,179.58 18.8,180.85 25.15,180.85 | 25.15,180.85 26.16,180.85 27.43,179.58 BATT+25.1 | S13.1 25.11,180.81 25.15,180.85
N$27  (via drill 0.51)
  Top 0.254: BAT14.POSITIVE@3 v65.81,169.16
  Top 0.813: 54.89,175.51 46.51,175.51 43.71,172.72 BAT14.POSITIVE@1 | 54.89,175.51 63.02,175.51 65.81,172.72 v65.81,169.16 v65.81,166.12 66.06,166.12 66.57,165.61 66.57,166.5 | BAT14.POSITIVE@2 v43.97,166.12 43.97,169.04 | S14.2 54.89,175.51 | BAT14.POSITIVE@1 43.71,168.91 43.46,168.66 43.46,169.04 | 43.97,169.04 BAT14.POSITIVE@1 | 43.97,169.04 v43.97,169.16 | 66.57,166.88 66.57,166.5 | 66.57,166.5 BAT14.POSITIVE@4
N$28
  Top 0.813: BATT+26.1 49.81,179.58 51.08,180.85 57.43,180.85 | 57.43,180.85 58.45,180.85 59.71,179.58 BATT+27.1 | S14.1 57.39,180.81 57.43,180.85
N$29  (via drill 0.51)
  Top 0.254: BAT15.POSITIVE@3 v98.09,169.16
  Top 0.813: 87.17,175.51 78.79,175.51 76,172.72 BAT15.POSITIVE@1 | 87.17,175.51 95.3,175.51 98.09,172.72 v98.09,169.16 v98.09,166.12 98.35,166.12 98.86,165.61 98.86,166.5 | BAT15.POSITIVE@2 v76.25,166.12 76.25,169.04 | S15.2 87.17,175.51 | BAT15.POSITIVE@1 76,168.91 75.74,168.66 75.74,169.04 | 76.25,169.04 BAT15.POSITIVE@1 | 76.25,169.04 v76.25,169.16 | 98.86,166.88 98.86,166.5 | 98.86,166.5 BAT15.POSITIVE@4
N$30
  Top 0.813: BATT+28.1 82.09,179.58 83.36,180.85 89.71,180.85 | 89.71,180.85 90.73,180.85 92,179.58 BATT+29.1 | S15.1 89.67,180.81 89.71,180.85

## Text on the board
Bottom: v13 | v13 | v13 | v13 | v13 | v13 | v13 | v13 | v13 | v13 | v13 | v13 | v13 | v13 | v13
Dimension: ROUTE OUT | ROUTE OUT | ROUTE OUT | ROUTE OUT | ROUTE OUT | ROUTE OUT | ROUTE / OUT | ROUTE OUT | ROUTE / OUT | ROUTE / OUT | ROUTE OUT | ROUTE / OUT | ROUTE / OUT | ROUTE OUT | ROUTE / OUT | ROUTE OUT | ROUTE OUT | ROUTE OUT | ROUTE OUT | ROUTE OUT | ROUTE OUT | ROUTE / OUT | ROUTE OUT | ROUTE / OUT | ROUTE OUT | ROUTE / OUT | ROUTE OUT | ROUTE / OUT | ROUTE / OUT | ROUTE / OUT | ROUTE OUT | ROUTE OUT | ROUTE OUT | ROUTE OUT | ROUTE OUT | ROUTE OUT | ROUTE / OUT | ROUTE OUT | ROUTE / OUT | ROUTE / OUT | ROUTE OUT | ROUTE / OUT | ROUTE / OUT | ROUTE OUT | ROUTE / OUT | ROUTE OUT | ROUTE OUT | ROUTE OUT | ROUTE OUT | ROUTE OUT | ROUTE OUT | ROUTE / OUT | ROUTE OUT | ROUTE / OUT | ROUTE / OUT | ROUTE OUT | ROUTE / OUT | ROUTE / OUT | ROUTE OUT | ROUTE / OUT | ROUTE OUT | ROUTE OUT | ROUTE OUT | ROUTE OUT | ROUTE OUT | ROUTE OUT | ROUTE / OUT | ROUTE OUT | ROUTE / OUT | ROUTE / OUT | ROUTE OUT | ROUTE / OUT | ROUTE / OUT | ROUTE OUT | ROUTE / OUT
tPlace: OFF | OFF | OFF | ON | ON | ON | + | + | + | + | + | + | - | - | - | - | - | - | OFF | ON | OFF | ON | OFF | ON | + | + | + | + | + | + | - | - | - | - | - | - | OFF | OFF | OFF | ON | ON | ON | + | + | + | + | + | + | - | - | - | - | - | - | OFF | ON | OFF | ON | OFF | ON | + | + | + | + | + | + | - | - | - | - | - | - | OFF | OFF | OFF | ON | ON | ON | + | + | + | + | + | + | - | - | - | - | - | -
bPlace: + | + | + | + | + | + | - | - | Switched Coin Cell Battery Holder | - | - | Switched Coin Cell Battery Holder | - | - | Switched Coin Cell Battery Holder | + | + | + | + | + | + | - | Switched Coin Cell Battery Holder | - | Switched Coin Cell Battery Holder | - | Switched Coin Cell Battery Holder | - | - | - | + | + | + | + | + | + | - | - | Switched Coin Cell Battery Holder | - | - | Switched Coin Cell Battery Holder | - | - | Switched Coin Cell Battery Holder | + | + | + | + | + | + | - | Switched Coin Cell Battery Holder | - | Switched Coin Cell Battery Holder | - | Switched Coin Cell Battery Holder | - | - | - | + | + | + | + | + | + | Switched Coin Cell Battery Holder | Switched Coin Cell Battery Holder | Switched Coin Cell Battery Holder | - | - | - | - | - | -
Milling: v-score | v-score | v-score | v-score | v-score | v-score | v-score | v-score | v-score | v-score | v-score | v-score | v-score | v-score
tDocu: Jim Lindblom | Jim Lindblom | Jim Lindblom | M. West | M. West | M. West | Jim Lindblom | Jim Lindblom | Jim Lindblom | M. West | M. West | M. West | Jim Lindblom | Jim Lindblom | Jim Lindblom | M. West | M. West | M. West | Jim Lindblom | Jim Lindblom | Jim Lindblom | M. West | M. West | M. West